# Altium PCB PCB1.PcbDoc
Units mm, origin at the board's own origin, x right, y up, seen from the top; angles counter-clockwise.
Board outline 61.27 x 52.27 mm, 2 copper layers (Top Layer, Bottom Layer); 19 components, 31 nets, 117 pads, 0 vias.
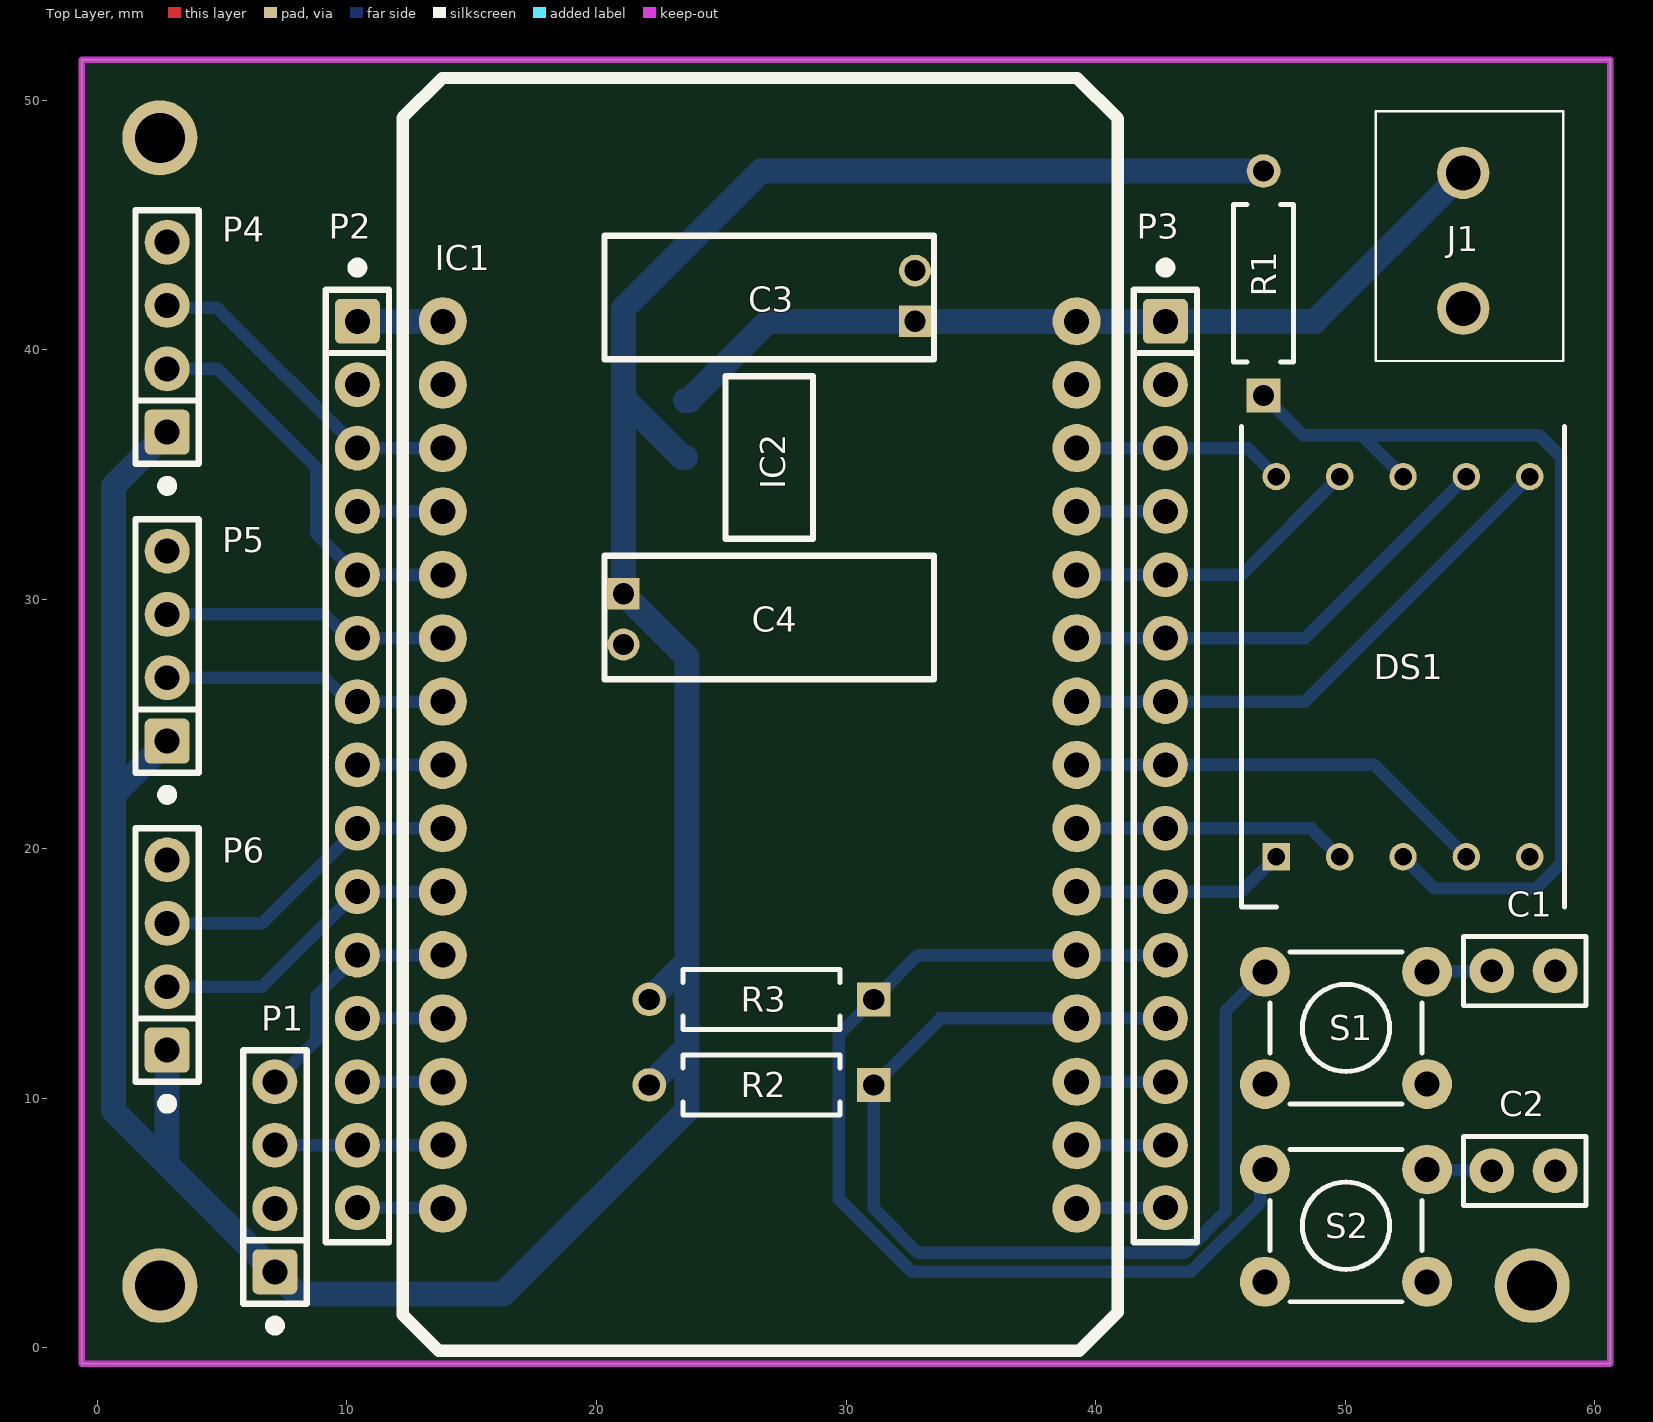
[diagram p0: Top Layer view]
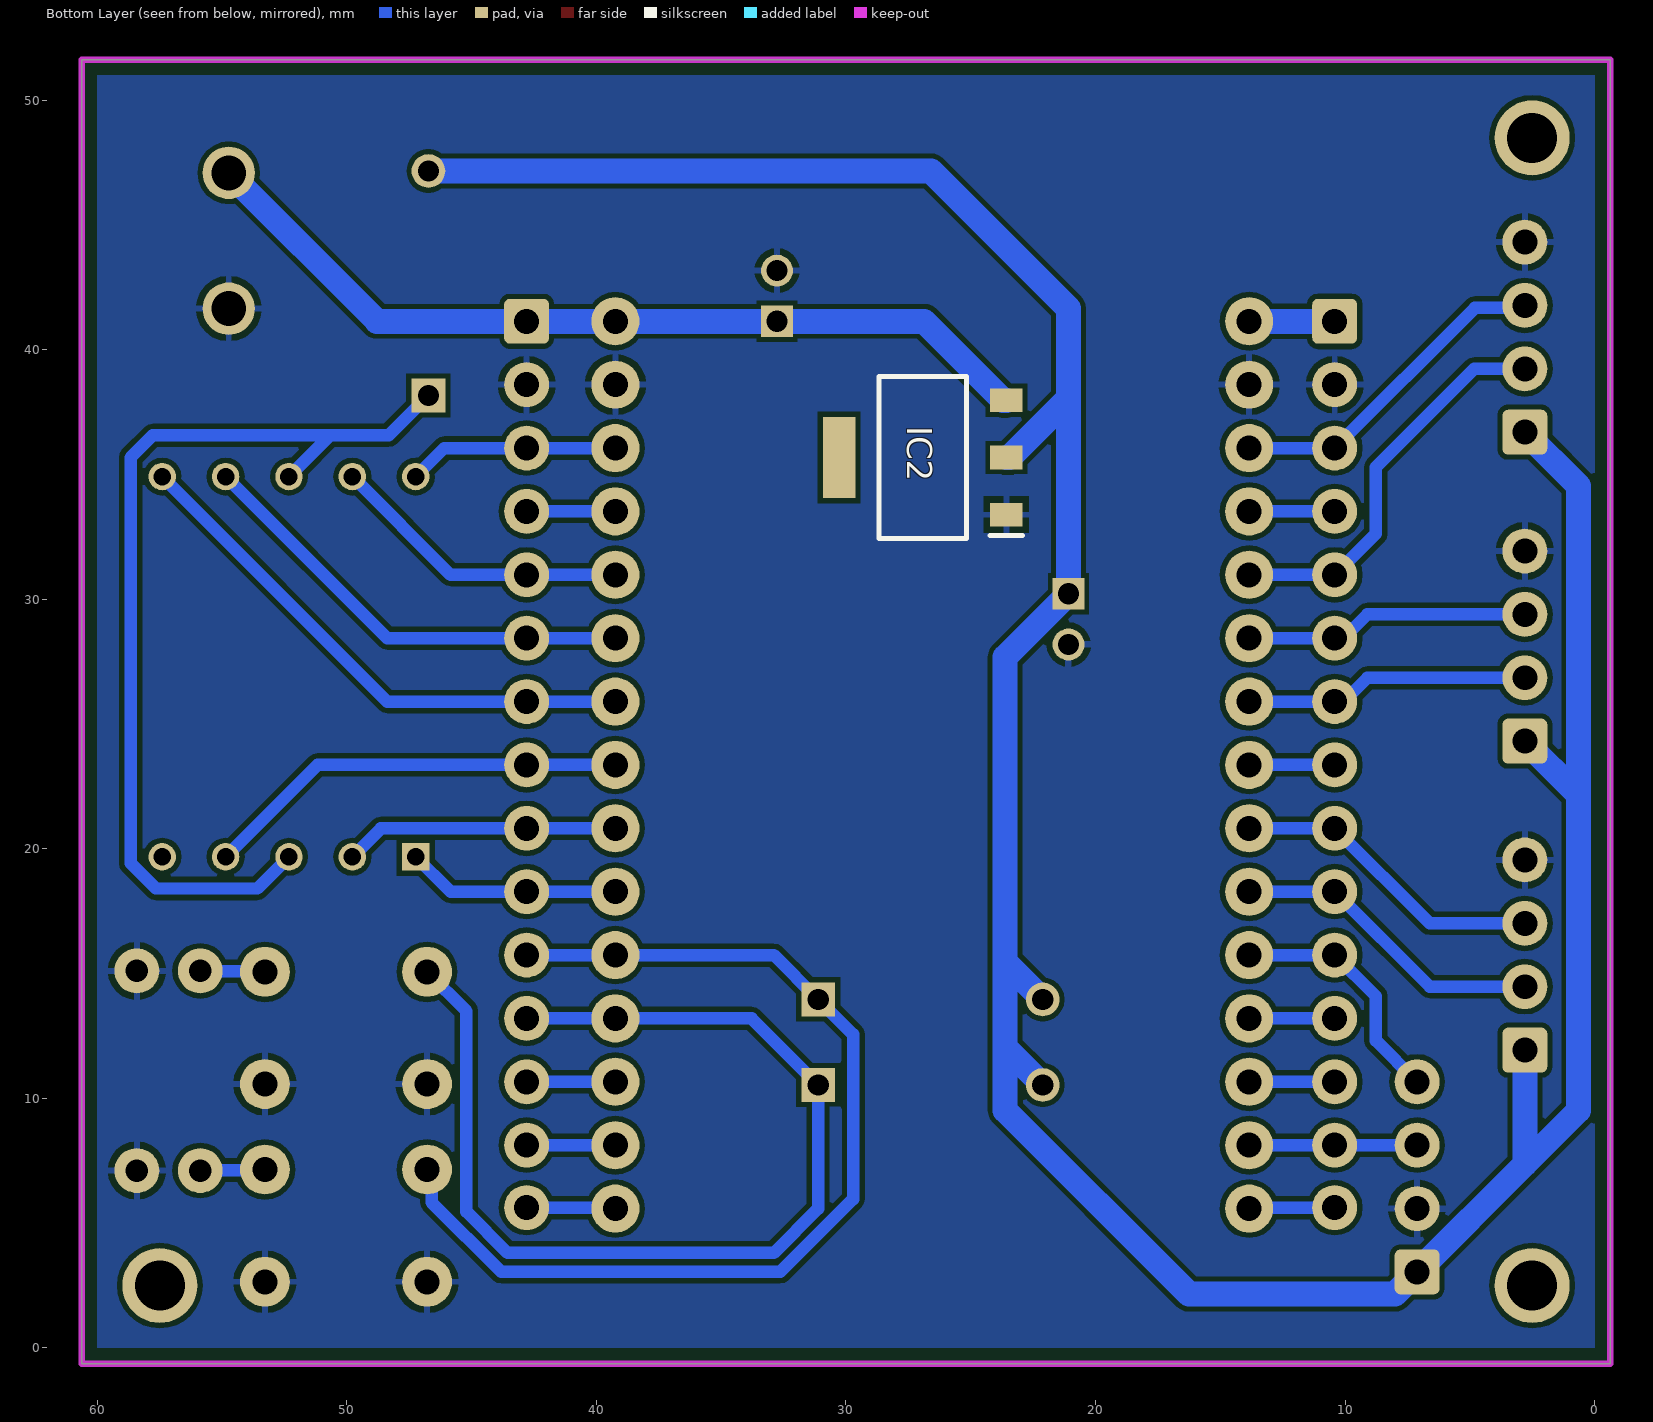
[diagram p1: Bottom Layer view, seen from below]

## Layer stack, top to bottom
Top Solder: solder mask 0.0102, Solder Resist, Dk 3.5
Top Layer: signal copper 0.0356
Dielectric 1: dielectric 0.32, FR-4, Dk 4.8
Bottom Layer: signal copper 0.0356
Bottom Solder: solder mask 0.0102, Solder Resist, Dk 3.5

## Board outline
-0.635,-0.635 -0.635,51.635 60.635,51.635 60.635,-0.635

## Design rules (kind name [scope] priority, off if disabled: settings)
Clearance [All] p1: gap=0.203 ignorepadtopadclearanceinfootprint=FALSE
PlaneClearance [All] p1: clearance=0.2
PolygonConnect [All] p1: connectstyle=Relief reliefconductorwidth=0.254 reliefentries=4 polygonreliefangle="90 Angle" airgapwidth=0.254
RoutingVias [All] p1: holewidth=0.711 width=1.27 viastyle="Through Hole" minholewidth=0.711 minwidth=1.27 maxholewidth=0.711 maxwidth=1.27
SilkToSolderMaskClearance [IsPad] p1: minsilkscreentomaskgap=0 clearancetoexposedcopper=TRUE
SolderMaskExpansion [All] p1: expansion=0.102 istentingtop=FALSE
Width [All] p1: maxlimit=1 minlimit=0.254 preferedwidth=0.5
28 further rules are at their usual default settings.

## Components (designator, comment, footprint, x,y, rotation, side; value= is the part's Value field where it differs from the comment)
C1 "CAP CER DISK 100NF 50V" "CAP CER DISK 100NF 50V" 57.15,15.113 r0 top
C2 "CAP CER DISK 100NF 50V" "CAP CER DISK 100NF 50V" 57.15,7.112 r0 top
C3 "100uF" CAPPRD250W65D630H900 32.766,41.148 r90 top
C4 "100uF" CAPPRD250W65D630H900 21.082,30.226 r270 top
DS1 "Display A 7 segmentos" DIPS1524W51P254L1270H825Q10N 47.244,19.685 r90 top
IC1 "ESP32 DevKit V1" "ESP32 DevKit V1" 26.543,26.148 r0 top
IC2 "AMS1117-3.3" SOT229P700X180-4N 26.924,35.687 r0 bottom
J1 "KF301-2P" KF3012P 54.737,47.096 r270 top
P1 "MPU6050" "Pin Header 1x8 TH Pitch 2.54mm" 7.112,3.048 r90 top
P2 "Header Female 1x15" "HDR FEMALE 1x15" 10.414,24.638 r270 top
P3 "Header Female 1x15" "HDR FEMALE 1x15" 42.799,24.638 r270 top
P4 "Header 1x4" "HDR MALE 1x4" 2.794,36.703 r90 top
P5 "Header 1x4" "HDR MALE 1x4" 2.794,24.32 r90 top
P6 "Header 1x4" "HDR MALE 1x4" 2.794,11.938 r90 top
R1 "MFR-25FBF52-47R5" RESA60-630X240 46.736,42.672 r90 top value=47R
R2 "10K" RESA60-630X240 26.615,10.541 r180 top
R3 "10K" RESA60-630X240 26.615,13.97 r180 top
S1 "Push Button" "TACT SWITCH 6X6X7MM" 50.038,12.827 r0 top
S2 "Push Button" "TACT SWITCH 6X6X7MM" 50.038,4.903 r0 top

## Footprints (in the part's own frame and the unit in brackets; to place one, negate y for a bottom-side part, rotate by r counter-clockwise, add the part's x,y. Pads: shape width x height; smd on the part's side, far side on the other; paste and mask are expansions set on the pad)
"CAP CER DISK 100NF 50V" [mm] "Connector; Header; 5 Position"
  round 1.8 hole 0.9: 1(-1.27,0) 2(1.27,0)
  silkscreen extent -2.4,-1.4 2.5,1.37, body extent -2.28,-1.25 2.42,1.25, height 6.1
CAPPRD250W65D630H900 [mm]
  rect 1.275x1.275 hole 0.85: 1(0,0)
  round 1.275 hole 0.85: 2(2.032,0)
  silkscreen extent -1.52,-0.76 3.43,12.45, body extent -1.52,-0.28 3.49,12.48, height 5.1
DIPS1524W51P254L1270H825Q10N [mm]
  rect 1.1x1.1 hole 0.7: 1(0,0)
  round 1.1 hole 0.7: 2(0,-2.54) 3(0,-5.08) 4(0,-7.62) 5(0,-10.16) 6(15.24,-10.16) 7(15.24,-7.62) 8(15.24,-5.08) 9(15.24,-2.54) 10(15.24,0)
  silkscreen extent -2,-11.56 17.24,1.4, body extent -1.25,-11.28 16.39,1.12, height 7
"ESP32 DevKit V1" [mm]
  round 1.93 / inner round 1.524 / far side round 1.93 hole 1: 1(-12.7,15) 2(-12.7,12.46) 3(-12.7,9.92) 4(-12.7,7.38) 5(-12.7,4.84) 6(-12.7,2.3) 7(-12.7,-0.24) 8(-12.7,-2.78) 9(-12.7,-5.32) 10(-12.7,-7.86) 11(-12.7,-10.4) 12(-12.7,-12.94) 13(-12.7,-15.48) 14(-12.7,-18.02) 15(-12.7,-20.56) 16(12.7,-20.56) 17(12.7,-18.02) 18(12.7,-15.48) 19(12.7,-12.94) 20(12.7,-10.4) 21(12.7,-7.86) 22(12.7,-5.32) 23(12.7,-2.78) 24(12.7,-0.24) 25(12.7,2.3) 26(12.7,4.84) 27(12.7,7.38) 28(12.7,9.92) 29(12.7,12.46) 30(12.7,15)
  silkscreen extent -14.31,-26.26 14.35,24.75, body extent -14.22,-26.09 14.28,24.84, height 13.2
"HDR FEMALE 1x15" [mm]
  rrect25% 1.8x1.8 hole 1: 1(-16.51,0)
  round 1.8 hole 1: 2(-13.97,0) 3(-11.43,0) 4(-8.89,0) 5(-6.35,0) 6(-3.81,0) 7(-1.27,0) 8(1.27,0) 9(3.81,0) 10(6.35,0) 11(8.89,0) 12(11.43,0) 13(13.97,0) 14(16.51,0) 15(19.01,0)
  silkscreen extent -18.81,-1.27 20.4,1.27, body extent -17.8,-1.4 20.44,1.1, height 8.5
"HDR MALE 1x4" [mm] "PinHeader 1x4 TH Pitch 2.54mm"
  rrect25% 1.8x1.8 hole 1: 1(0,0)
  round 1.8 hole 1: 2(2.54,0) 3(5.08,0) 4(7.62,0)
  silkscreen extent -2.3,-1.27 8.89,1.27, body extent -1.27,-1.27 8.89,6.12, height 5.02
KF3012P [mm]
  round 2.1 hole 1.4: 1(0,0) 2(5.44,0)
  silkscreen extent -2.46,-3.5 7.54,4, body extent -2.21,-4.43 7.79,5.97, height 14.8
"Pin Header 1x8 TH Pitch 2.54mm" [mm] "PinHeader 1x8 TH Pitch 2.54mm"
  rrect25% 1.8x1.8 hole 1: 1(0,0)
  round 1.8 hole 1: 2(2.54,0) 3(5.08,0) 4(7.62,0)
  silkscreen extent -2.3,-1.27 8.89,1.27, body extent -1.41,-1.4 19.7,14.48, height 14.64
RESA60-630X240 [mm] "Axial Resistor, 2-Leads, Dia 2.4mm, Body Length 6.3mm"
  rect 1.35x1.35 hole 0.85: 1(-4.5,0)
  round 1.35 hole 0.85: 2(4.5,0)
  silkscreen extent -3.15,-1.2 3.15,1.2, body extent -4.77,-1.19 4.77,1.2, height 2.4
SOT229P700X180-4N [mm]
  rect 1.3x0.95 smd: 1(-3.35,2.29) 2(-3.35,0) 3(-3.35,-2.29)
  rect 1.3x3.25 smd: 4(3.35,0)
  silkscreen extent -4,-3.25 1.75,3.25, body extent -3.5,-3.25 3.5,3.25, height 1.8
"TACT SWITCH 6X6X7MM" [mm] "Tactile Switch 6x6x7mm"
  round 2 hole 1: 1(-3.25,2.25) 2(3.25,2.25) 3(-3.25,-2.25) 4(3.25,-2.25)
  silkscreen extent -3.05,-3.05 3.05,3.05, body extent -3.95,-3.1 3.95,3.1, height 7

## Part data
C1 C2: library part CMP-018-000011-1, Capacitance=0.1uF, Capacitance Tolerance="+80%, -20%", Capacitor Terminals="Radial Leaded", Dielectric Characteristic=Y5, Manufacturer=-, Manufacturer Part Number=IMP14925, Operating Temperature Max=85, Operating Temperature Min=-25, Operating Temperature Range="-25°C to +85°C<!--FANDB--><div class=\"features-and-benefits-container\"><div class=\"features-and-benefits-description\"><span class=\"features-benefits-value\">The MCFY series from Multicomp are radial leaded ceramic disc capacitors. The capacitance values ranges from 6800pF to 0.22?F.</span></div><div class=\"features-and-benefits-list\"><ul class=\"features-and-benefits-list-list\"><li class=\"features-and-benefits-list-item\">Large capacitance in small size</li><li class=\"features-and-benefits-list-item\">Rated voltage of 50V</li><li class=\"features-and-benefits-list-item\">80%/-20% tolerance</li><li class=\"features-and-benefits-list-item\">Operating temperature range -25°C to +85", Voltage Rating=50, Capacitance Tolerance ±="+80%, -20%", ComponentLink1Description=http://loja.multcomercial.com.br/capacitor-ceramico-disco-100kpf-50v-104-100k-100nf-0-1uf-cod-1351.html, ComponentLink1URL=http://loja.multcomercial.com.br/capacitor-ceramico-disco-100kpf-50v-104-100k-100nf-0-1uf-cod-1351.html, Design Item ID="CAP CER DISK 100NF 50V", Lead Spacing=5, Packaging=Each, Pricing 1="1=0.10 (BRL)", Product Range="MCFY Series", RoHS=YES, Source=Capacitores_SCHLIB.SchLib, Stock 1=115809, SVHC="No SVHC (15-Jun-2015)"
C3 C4: library part 16SEPC100MW+S, "Capacitor Polarised", Manufacturer_Name=Panasonic, Mouser Part Number=667-16SEPC100MW+S, Arrow Part Number=16SEPC100MW+S, Arrow Price/Stock=https://www.arrow.com/en/products/16sepc100mws/panasonic, Datasheet Link=http://industrial.panasonic.com/www-cgi/jvcr13pz.cgi?E+CI+4+AAB8010+16SEPC100MW+8+WW, Height=9mm, Manufacturer_Part_Number=16SEPC100MW+S, Mouser Price/Stock=https://www.mouser.co.uk/ProductDetail/Panasonic/16SEPC100MW%2bS?qs=OE1iw1LrrPGijFXueDJbGQ%3D%3D
DS1: library part C-551SRD-NW_B_W, "Display", Manufacturer_Name="Para Light Electronics", Manufacturer_Part_Number="C-551SRD-NW B/W", Datasheet Link=http://akizukidenshi.com/download/ds/paralight/C-551SRD.pdf, Height=8.25mm
IC2: "Integrated Circuit", Manufacturer_Name="Advanced Monolithic Systems", Datasheet Link=http://www.advanced-monolithic.com/pdf/ds1117.pdf, Height=1.8mm, Manufacturer_Part_Number=AMS1117-3.3
J1: "Connector", Manufacturer_Name="Handson Technology", Datasheet Link=http://www.handsontec.com/dataspecs/terminal%20block-5mm.pdf, Height=10mm, Manufacturer_Part_Number=KF301-2P
P1: library part "MPU6050 module", "Headers & Wire Housings 36Pin 2mm Spacing Single Row Hdrs, 5pc", Design Item ID="Header Male 1x8", Source=Conectores_SCHLIB.SchLib
P2 P3: "Headers & Wire Housings 40Pin 2mm Spacing Single Row Hdrs, 5pc", Manufacturer=Cromax, Manufacturer Part Number=-, Accessory Type=-, Brand=Cromax, Category="Headers & Wire Housings", ComponentLink1Description=-, ComponentLink1URL=-, Contact Gender="Pin (Female)", Contact Plating=Gold, Contact Type=-, Minimum Order Quantity=1, Mounting Angle=Vertical, Mounting Style="Straight Pin", Number of Positions="40 Position", Number of Rows="1 Row", Pitch="2 mm", Pricing 1="1=1.60, 5=0.32 (BRL)", Product=Headers, Product Category=Accessories, Reeling=False, RoHS="RoHS Compliant", RoHS - Mouser=Y, Row Spacing=-, Stock 1=14, Supplier 1=-, Supplier Part Number 1=-, Termination Style="Through Hole", Type=Breakaway
P4 P5 P6: "Headers & Wire Housings 40Pin 2mm Spacing Single Row Hdrs, 5pc", Manufacturer=Cromax, Manufacturer Part Number=IMP10327, Supplier Part Number 1="Barra de Pinos Simples 1x40 Macho BMO40-1E", Accessory Type=-, Brand=Cromax, Category="Headers & Wire Housings", ComponentLink1Description=http://loja.multcomercial.com.br/barra-de-pinos-simples-1x40-macho-bmo40-1e.html, ComponentLink1URL=http://loja.multcomercial.com.br/barra-de-pinos-simples-1x40-macho-bmo40-1e.html, Contact Gender="Pin (Male)", Contact Plating=Gold, Contact Type=-, Minimum Order Quantity=1, Mounting Angle=Vertical, Mounting Style="Straight Pin", Number of Positions="40 Position", Number of Rows="1 Row", Pitch="2 mm", Pricing 1="1=1.00, 5=0.20 (BRL)", Product=Headers, Product Category=Accessories, Reeling=False, RoHS="RoHS Compliant", RoHS - Mouser=Y, Row Spacing=-, Stock 1=14, Supplier 1="Mult Comercial", Termination Style="Through Hole", Type=Breakaway
R1: library part CMP-009-00058-3, "Axial Resistor, 47.5 Ohm, +/- 1%, 0.25 W, -55 to 155 degC, 2-Pin THD, RoHS, Bulk", Case/Package=Axial, Manufacturer=Yageo, Max Operating Temperature=155°C, Min Operating Temperature=-55°C, Package Description="2-Pin Axial Lead, Dia 2.4 mm, Body Length 6.3 mm", Package Quantity=200, Package Reference=MFR-25, Power=250mW, Tolerance=1%, Voltage Rating=250V, Datasheet URL=http://www.yageo.com/documents/recent/Yageo%20LR_MFR_2013.pdf, Datasheet Version=Apr-13, Manufacturer URL=http://www.yageo.com/, Mounting Technology=TH, Packaging=Bulk, RoHS Compliant=True
R2 R3: library part CMP-009-00047-1, "Axial Resistor, 10 KOhm, +/- 1%, 0.25 W, -55 to 155 degC, 2-Pin THD, RoHS, Bulk", Case/Package=Axial, Manufacturer=Yageo, Max Operating Temperature=155°C, Min Operating Temperature=-55°C, Package Description="2-Pin Axial Lead, Dia 2.4 mm, Body Length 6.3 mm", Package Quantity=200, Package Reference=MFR-25, Power=250mW, Resistance=10k, Tolerance=1%, Voltage Rating=250V, Datasheet URL=http://www.yageo.com/documents/recent/Yageo%20LR_MFR_2013.pdf, Datasheet Version=Apr-13, Manufacturer URL=http://www.yageo.com/, Mounting Technology=TH, Packaging=Bulk, RoHS Compliant=True
S1 S2: library part CMP-022-000000-1, "SWITCH TACTILE SPST-NO 0.02A 15V", Contact Rating @ Voltage="0.02A @ 15VDC", Illumination Type, Color=-, Manufacturer="Panasonic Electronic Components", Manufacturer Part Number=EVQ-PAC07K, Operating Force=100gf, Operating Temperature="-20°C ~ 70°C", Actuator Height off PCB, from Pins=7.00mm, Actuator Material=-, Actuator Orientation="Top Actuated", Actuator Type=Standard, Category=Switches, Circuit=SPST-NO, ComponentLink1Description=http://industrial.panasonic.com/cdbs/www-data/pdf/ATK0000/ATK0000CE10.pdf, ComponentLink1URL=http://industrial.panasonic.com/cdbs/www-data/pdf/ATK0000/ATK0000CE10.pdf, Design Item ID="SWITCH TACTILE SPST-NO 0.02A 15V", Features=-, Illumination=Non-Illuminated, Illumination Voltage (Nominal)=-, Ingress Protection=-, Mechanical Life="100,000 Cycles", Mounting Type="Through Hole", Outline="6.00mm x 6.00mm", Packaging=Bulk, Part Status=Active, Pricing 1="1=0.27, 10=0.254, 25=0.2168, 50=0.1896, 100=0.176, 250=0.15572, 500=0.14894, 1000=0.12186, 5000=0.10832 (USD)", RoHS="RoHS Compliant", Source=Conectores_SCHLIB.SchLib, Stock 1=19805, Switch Function=Off-Mom, Switch Travel=0.25mm, Termination Style="PC Pin"

## Free pads (board coordinates)
  round 3 hole 2: 2(2.5,2.5) 2(2.5,48.5) 2(57.5,2.5)

## Nets (pads, with @x,y where several pads share a name; then routed paths per layer and width w, separated by ;. In a path a pad name is that pad's centre, name@x,y a point inside that pad or via, vN(x,y) a via of type N, cw(c..) or ccw(c..) an arc to the next point about the centre after c; other vN are vias at no path point)
3V3: C4.1 IC2.2 P1.1 P4.1 P5.1 P6.1 R1.2 R2.2 R3.2 | length 133.6
  Bottom Layer w1: P6.1 2.794,7.366 ; P5.1 0.635,22.162 ; P4.1 0.635,34.544 0.635,22.162 ; R2.2 23.622,12.048 ; R3.2 23.622,15.477 ; IC2.2 23.449,35.687 21.082,38.054 ; R1.2 30.099,47.172 26.598,47.172 21.082,41.656 21.082,38.054 ; 0.635,22.162 0.635,9.525 2.794,7.366 ; 2.794,7.366 P1.1 8.001,2.159 16.256,2.159 23.622,9.525 23.622,12.048 ; 21.082,38.054 C4.1 23.622,27.686 23.622,15.477 ; 23.622,12.048 23.622,15.477
"Botão 1": C1.1 IC1.19 P3.12 R2.1 S1.1 S1.2 | length 46.2
  Bottom Layer w0.5: P3.12 IC1.19 33.782,13.208 R2.1 31.115,5.588 32.893,3.81 43.561,3.81 45.212,5.461 45.212,13.501 S1.1 ; S1.2 53.306,15.095 55.862,15.095 C1.1 C1.1@55.83,15.163
"Botão 2": C2.1 IC1.20 P3.11 R3.1 S2.1 S2.2 | length 44.7
  Bottom Layer w0.5: P3.11 IC1.20 32.893,15.748 R3.1 29.718,12.573 29.718,5.969 32.639,3.048 43.815,3.048 46.604,5.837 46.604,6.969 S2.1 ; S2.2@53.694,7.153 S2.2 53.309,7.133 55.859,7.133 C2.1
C_A: DS1.7 IC1.25 P3.6 | length 18.3
  Bottom Layer w0.5: IC1.25 P3.6 48.387,28.448 DS1.7
C_B: DS1.6 IC1.24 P3.7 | length 21.9
  Bottom Layer w0.5: IC1.24 P3.7 48.387,25.908 DS1.6
C_C: DS1.4 IC1.23 P3.8 | length 17.1
  Bottom Layer w0.5: IC1.23 P3.8 51.181,23.368 DS1.4
C_D: DS1.2 IC1.22 P3.9 | length 11
  Bottom Layer w0.5: IC1.22 P3.9 48.641,20.828 DS1.2
C_E: DS1.1 IC1.21 P3.10 | length 8.6
  Bottom Layer w0.5: IC1.21 P3.10 45.847,18.288 DS1.1
C_F: DS1.9 IC1.26 P3.5 | length 12.2
  Bottom Layer w0.5: IC1.26 P3.5 45.847,30.988 DS1.9
C_G: DS1.10 IC1.28 P3.3 | length 8.5
  Bottom Layer w0.5: IC1.28 P3.3 46.101,36.068 DS1.10
DT_X: IC1.3 P2.3 P4.3 | length 13.4
  Bottom Layer w0.5: P4.3 2.891,41.686 4.796,41.686 P2.3 IC1.3
DT_Y: IC1.6 P2.6 P5.3 | length 11.4
  Bottom Layer w0.5: P5.3 9.11,29.4 10.062,28.448 P2.6 IC1.6
DT_Z: IC1.9 P2.9 P6.3 | length 12.6
  Bottom Layer w0.5: P6.3 6.604,17.018 P2.9 IC1.9
GND: C1.2 C2.2 C3.2 C4.2 IC1.2 IC1.29 IC2.1 J1.2 P1.2 P2.2 P3.2 P4.4 P5.4 P6.4 S1.3 S1.4 S2.3 S2.4
NetDS1_3: DS1.3 DS1.8 R1.1 | length 38.9
  Bottom Layer w0.5: R1.1 48.332,36.576 50.673,36.576 ; DS1.3 53.594,18.415 57.658,18.415 58.674,19.431 58.674,35.687 57.785,36.576 50.673,36.576 ; DS1.8 50.673,36.576
NetIC1_1: IC1.1 P2.1 | length 3.4
  Bottom Layer w1: P2.1 IC1.1
NetIC1_4: IC1.4 P2.4 | length 3.4
  Bottom Layer w0.5: P2.4 IC1.4
NetIC1_8: IC1.8 P2.8 | length 3.4
  Bottom Layer w0.5: P2.8 IC1.8
NetIC1_12: IC1.12 P2.12 | length 3.4
  Bottom Layer w0.5: P2.12 IC1.12
NetIC1_13: IC1.13 P2.13 | length 3.4
  Bottom Layer w0.5: P2.13 IC1.13
NetIC1_15: IC1.15 P2.15 | length 3.4
  Bottom Layer w0.5: P2.15 13.803,5.628 IC1.15
NetIC1_16: IC1.16 P3.15 | length 3.6
  Bottom Layer w0.5: IC1.16 39.283,5.628 P3.15
NetIC1_17: IC1.17 P3.14 | length 3.6
  Bottom Layer w0.5: IC1.17 P3.14
NetIC1_18: IC1.18 P3.13 | length 3.6
  Bottom Layer w0.5: IC1.18 P3.13
NetIC1_27: IC1.27 P3.4 | length 3.6
  Bottom Layer w0.5: IC1.27 P3.4
SCK_X: IC1.5 P2.5 P4.2 | length 16
  Bottom Layer w0.5: P4.2 4.826,39.243 8.763,35.306 8.763,32.639 P2.5 IC1.5
SCK_Y: IC1.7 P2.7 P5.2 | length 11.4
  Bottom Layer w0.5: P5.2 9.11,26.86 10.062,25.908 P2.7 IC1.7
SCK_Z: IC1.10 P2.10 P6.2 | length 12.6
  Bottom Layer w0.5: P6.2 6.604,14.478 P2.10 IC1.10
SCL: IC1.14 P1.3 P2.14 | length 6.7
  Bottom Layer w0.5: P1.3 P2.14 IC1.14
SDA: IC1.11 P1.4 P2.11 | length 9.9
  Bottom Layer w0.5: P1.4 8.763,12.319 8.763,14.097 P2.11 IC1.11
VCC: C3.1 IC1.30 IC2.3 J1.1 P3.1 | length 34.9
  Bottom Layer w1: IC2.3 23.699,37.977 26.87,41.148 C3.1 IC1.30 P3.1 48.789,41.148 J1.1
pads on no net: DS1.5 IC2.4

## Polygon pours and split planes (outlines as drawn)
GND on Bottom Layer "GND_L02_P000" (solid, pour order 0): 0,0 0,51 60,51 60,0

## Keep-outs
Keep-Out Layer:
  the board outline again, w0.254

## Silkscreen, mask and mechanical layers (free items; w line width, h text height)
Top Overlay:
  lines w0.254: 25.172,32.435 28.676,32.435 28.676,38.939 25.172,38.939 25.172,32.435
  text "IC2" at 27.559,34.417 h1 r90

## Dimensions
2.5,48.5 to 2.5,2.5 on Mechanical 16
2.5,2.5 to 57.5,2.5 on Mechanical 16

## Text inside footprints (layer, text, board x,y; h text height)
C1: Mechanical 29 "1" at 56.75,14.013 h0.5
C2: Mechanical 29 "1" at 56.75,6.012 h0.5